# Altium PCB Connect.PcbDoc
Units mil, origin at the board's own origin, x right, y up, seen from the top; angles counter-clockwise.
Board outline 3917.27 x 3081.95 mil, 2 copper layers (Top Layer, Bottom Layer); 16 components, 33 nets, 102 pads, 4 vias.
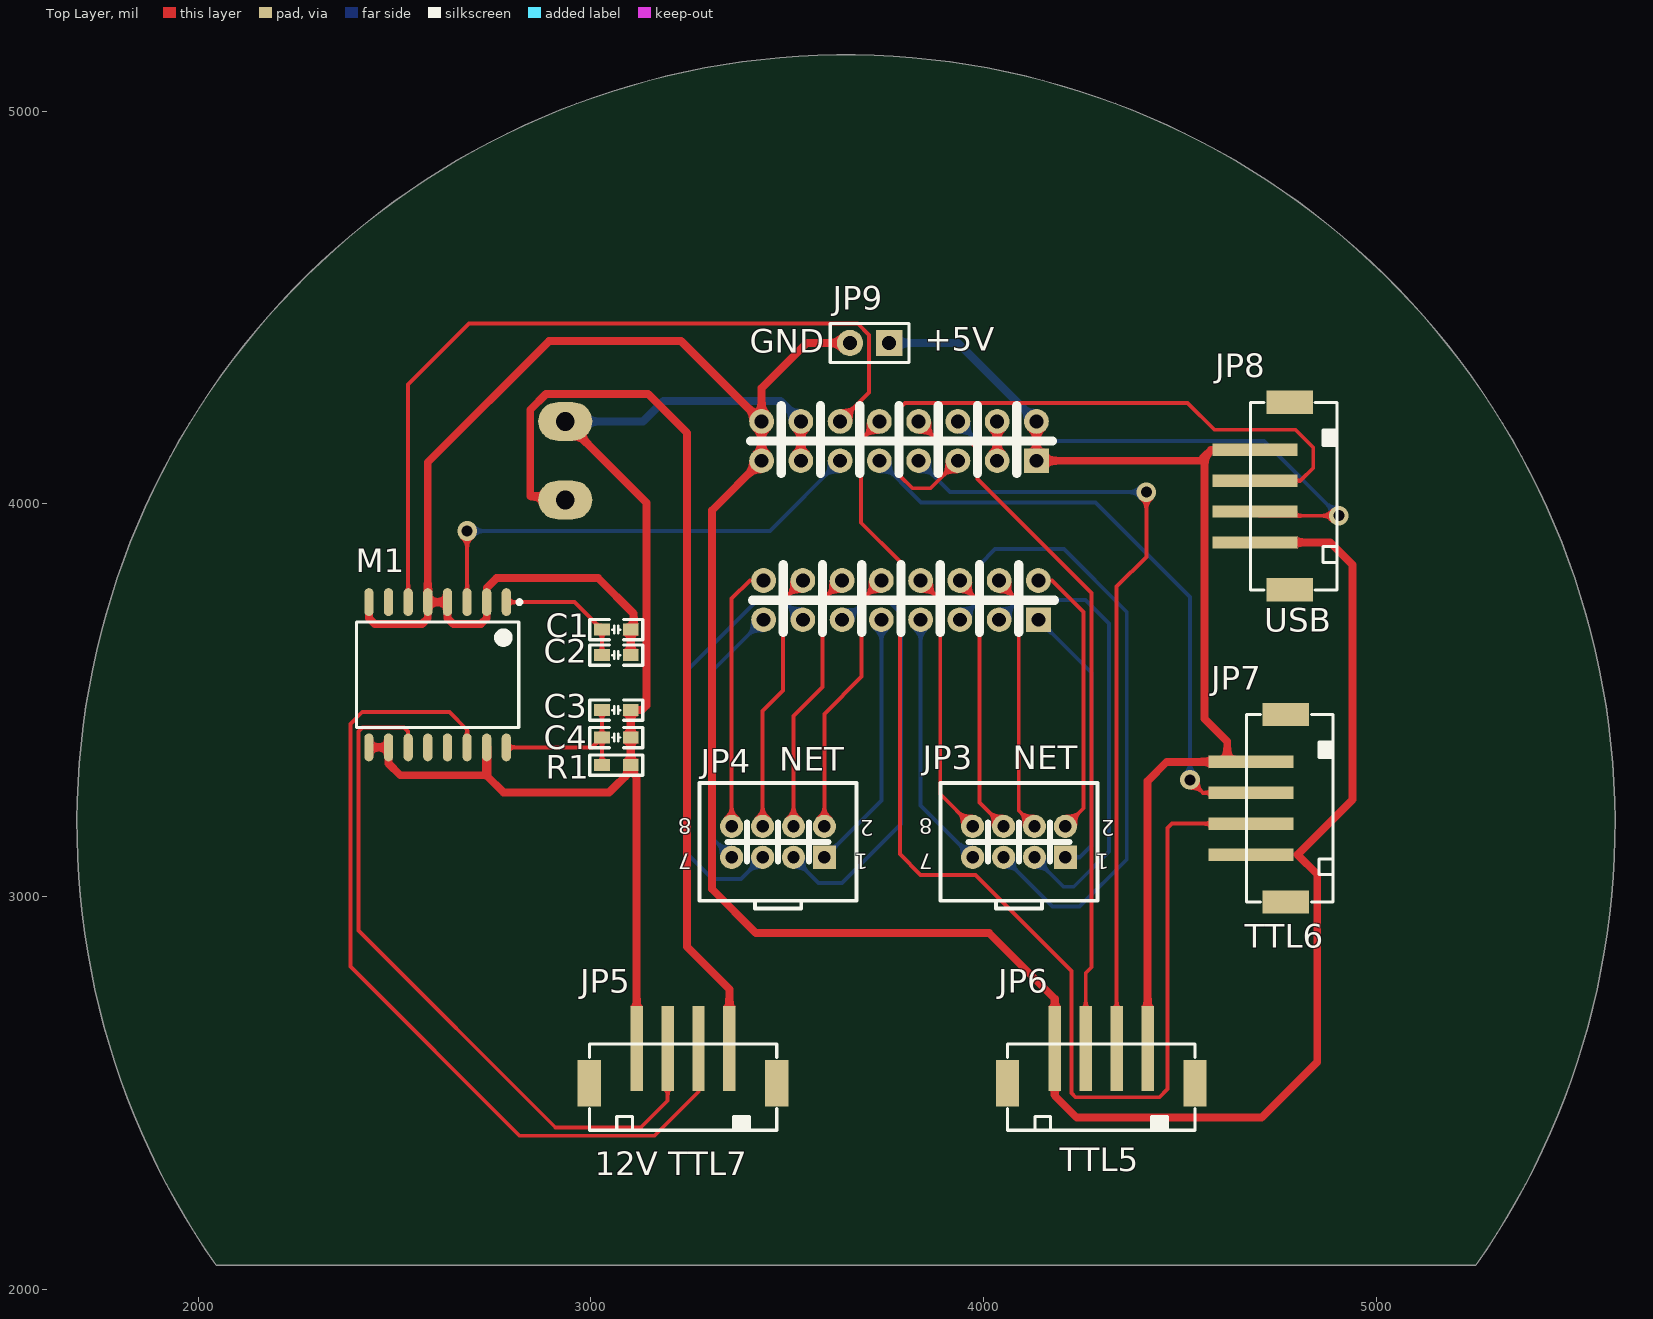
[diagram p0: Top Layer view]
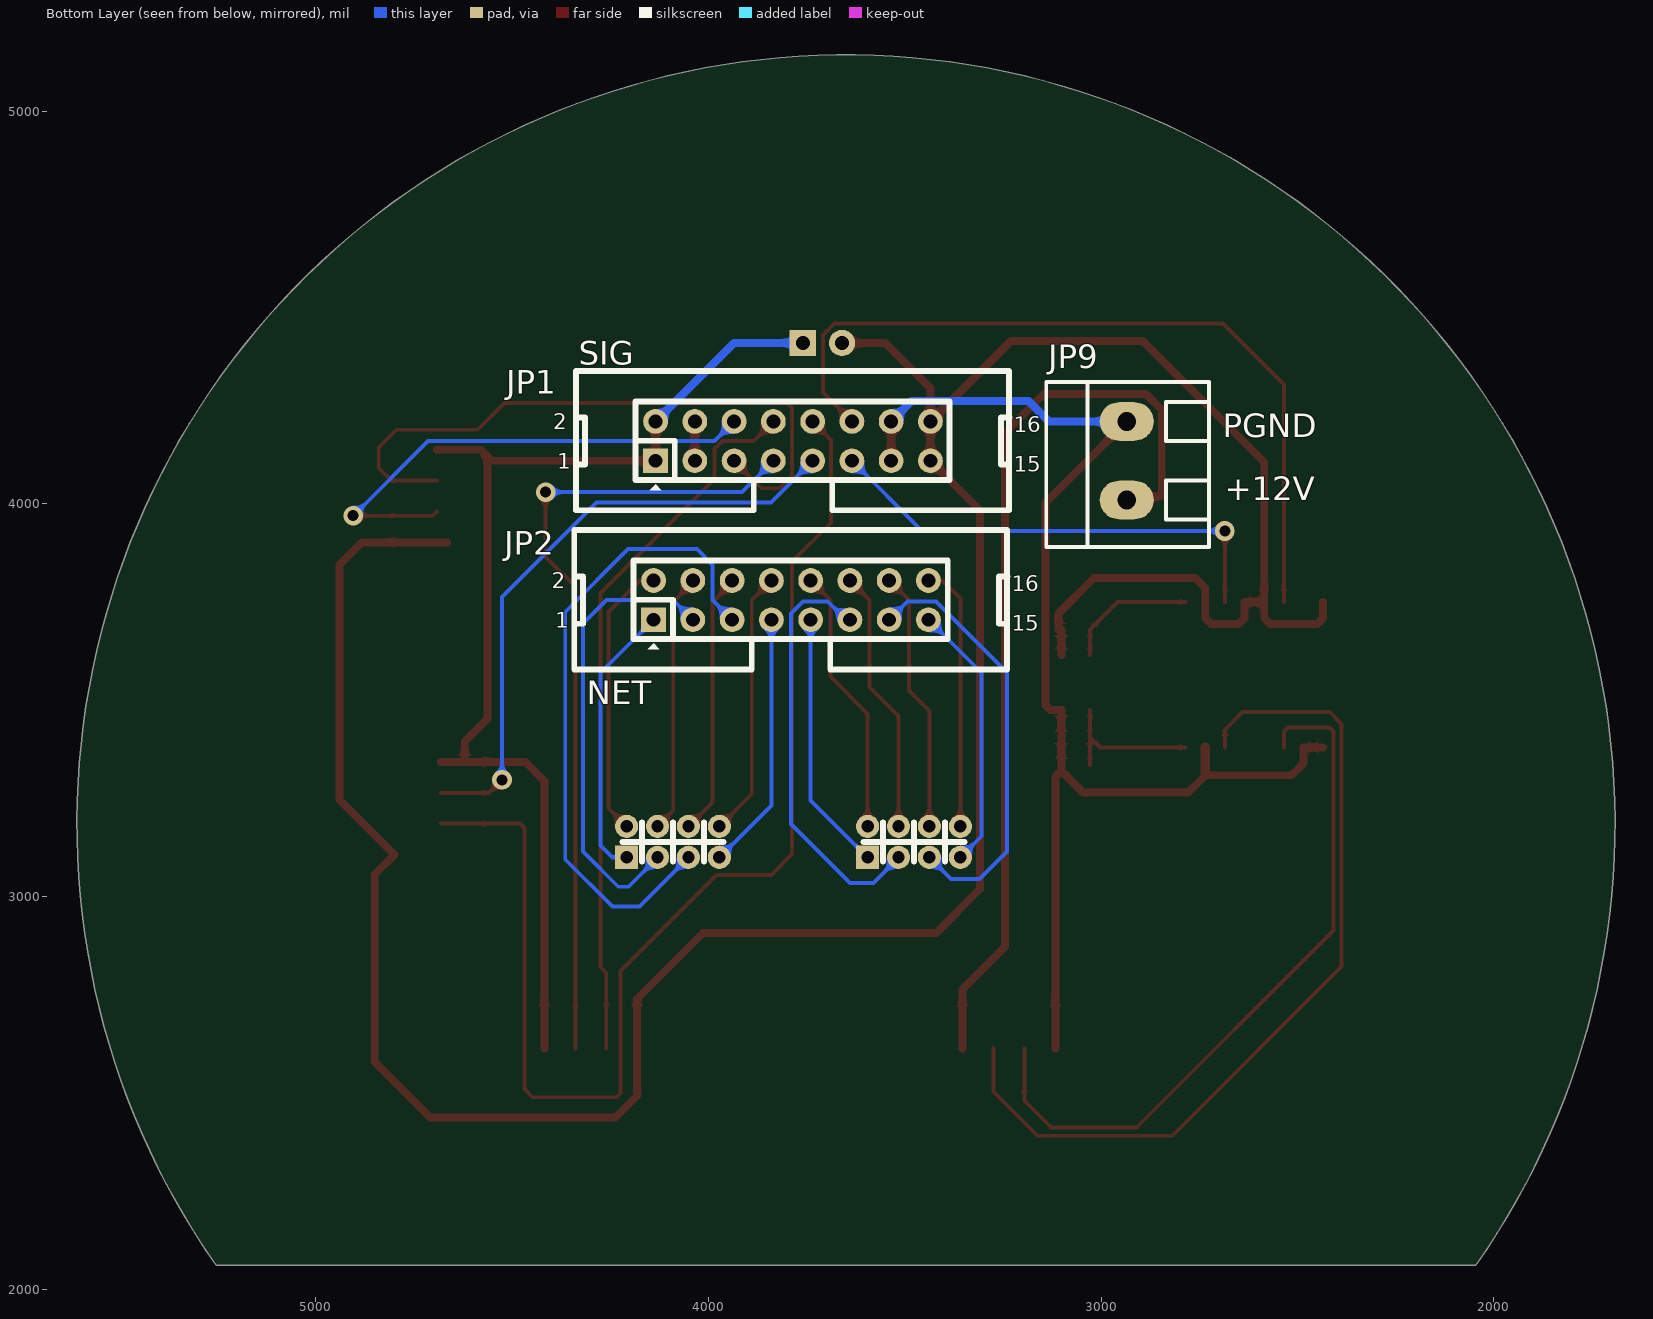
[diagram p1: Bottom Layer view, seen from below]

## Layer stack, top to bottom
Top Solder: solder mask 0.4, Solder Resist, Dk 3.5
Top Layer: signal copper 1.4
Dielectric 1: dielectric 12.6, FR-4, Dk 4.8
Bottom Layer: signal copper 1.4
Bottom Solder: solder mask 0.4, Solder Resist, Dk 3.5

## Board outline
2045.56,2061.56 cw(c3650,3185) 5254.44,2061.56

## Design rules (kind name [scope] priority, off if disabled: settings)
Clearance [All] p1: gap=10 ignorepadtopadclearanceinfootprint=FALSE
PolygonConnect [All] p1: connectstyle=Relief reliefconductorwidth=10 reliefentries=4 polygonreliefangle="90 Angle" airgapwidth=10
RoutingVias [All] p1: holewidth=28 width=50 viastyle="Through Hole" minholewidth=28 minwidth=50 maxholewidth=28 maxwidth=50
SolderMaskExpansion [All] p1: expansion=4
Width Width_POWER [InNetClass('POWER')] p1: maxlimit=40 minlimit=15 preferedwidth=20 minimp=50.000000 maximp=50.000000 favimp=50.000000
Width [All] p2: maxlimit=40 minlimit=10 preferedwidth=10 minimp=50.000000 maximp=50.000000 favimp=50.000000
30 further rules are at their usual default settings.

## Classes and differential pairs
net class power: +3.3 +5 +12 GND PGND
component class Connect: C1 C2 C3 C4 JP1 JP2 JP3 JP4 JP5 JP6 JP7 JP8 JP9 M1 R1

## Components (designator, comment, footprint, x,y, rotation, side; value= is the part's Value field where it differs from the comment)
C1 "10u" "C 0603_M" 3065,3680 r0 top
C2 "0.1u" "C 0603_M" 3065,3615 r0 top
C3 "10u" "C 0603_M" 3065,3475 r0 top
C4 "0.1u" "C 0603_M" 3065,3405 r0 top
JP1 "Header 8X2" IDC2.54-LI-2x8P 4135,4110 r180 bottom
JP2 "Header 8X2" IDC2.54-LI-2x8P 4140,3705 r180 bottom
JP3 "预留" PHB2.0-LI-2x4P 4090.63,3139.37 r180 top
JP4 "预留" PHB2.0-LI-2x4P 3476.89,3139.37 r180 top
JP5 "HDR-1X4" PH2.0-LS-4P 3235,2515 r180 top
JP6 "HDR-1X4" PH2.0-LS-4P 4300,2515 r180 top
JP7 "HDR-1X4" PH2.0-LS-4P 4780,3225 r270 top
JP8 "HDR-1X4" PH2.0-LS-4P 4790,4020 r270 top
JP9 "HDR-1X2" HDR2.54-LI-2P 3710,4410 r180 top
JP9 "HDR-1X2" KF128-5.08-2P 2935,4110 r90 bottom
M1 "ISOW7841" 7840 2610,3564.96 r270 top
R1 "10K" "R 0603_M" 3065,3335 r0 top

## Footprints (in the part's own frame and the unit in brackets; to place one, negate y for a bottom-side part, rotate by r counter-clockwise, add the part's x,y. Pads: shape width x height; smd on the part's side, far side on the other; paste and mask are expansions set on the pad)
7840 [mm]
  oval 1.8x0.6 smd: 1(-4.7,4.445) 2(-4.7,3.175) 3(-4.7,1.905) 4(-4.7,0.635) 5(-4.7,-0.635) 6(-4.7,-1.905) 7(-4.7,-3.175) 8(-4.7,-4.445) 9(4.7,-4.445) 10(4.7,-3.175) 11(4.7,-1.905) 12(4.7,-0.635) 13(4.7,0.635) 14(4.7,1.905) 15(4.7,3.175) 16(4.7,4.445)
  silkscreen extent -4.82,-5.25 3.4,5.42, body extent -3.8,-5.25 3.8,5.25, height 2.65
"C 0603_M" [mil] "无极性贴片电容"
  rect 40x30 smd: 1(-36.5,0) 2(36.5,0)
  silkscreen extent -68,-26 68,26, body extent -31,-16 31,16, height 32
HDR2.54-LI-2P [mm] "排针，2脚"
  rect 1.7x1.7 hole 0.9: 1(-1.27,0)
  round 1.7 hole 0.9: 2(1.27,0)
  silkscreen extent -2.54,-1.27 2.54,1.27, body extent -2.54,-1.27 2.54,1.27, height 8.5
IDC2.54-LI-2x8P [mm] "16P简易牛角座"
  rect 1.6x1.6 hole 0.9: 1(0,0)
  round 1.6 hole 0.9: 2(0,2.54) 3(2.54,0) 4(2.54,2.54) 5(5.08,0) 6(5.08,2.54) 7(7.62,0) 8(7.62,2.54) 9(10.16,0) 10(10.16,2.54) 11(12.7,0) 12(12.7,2.54) 13(15.24,0) 14(15.24,2.54) 15(17.78,0) 16(17.78,2.54)
  silkscreen extent -5.14,-3.2 22.89,5.8, body extent -5.08,-3.08 22.86,5.77, height 9.17
KF128-5.08-2P [mm] "螺钉式接线端子，脚距5.08mm"
  oval 2.5x3.5 hole 1.2: 1(-2.54,0) 2(2.54,0)
  silkscreen extent -5.59,-5.31 5.08,5.21, body extent -5.58,-5.3 5.08,5.2, height 14.15
PH2.0-LS-4P [mm] "长：12mm，宽：5.5mm，高：6.1mm"
  rect 1.5x3 smd: 0(-6.064,-0.254) 0(6.064,-0.254)
  rect 0.8x5.5 smd: 1(-3,-2.492) 2(-1,-2.492) 3(1,-2.492) 4(3,-2.492)
  silkscreen extent -6.06,-2.79 6.06,2.79, body extent -6,-5.05 6,2.75, height 6.15
PHB2.0-LI-2x4P [mm] "长：10mm，宽：7.3mm，高：7.8mm"
  rect 1.5x1.5 hole 0.8: 1(-3,1)
  round 1.5 hole 0.8: 2(-3,-1) 3(-1,1) 4(-1,-1) 5(1,1) 6(1,-1) 7(3,1) 8(3,-1)
  silkscreen extent -5.08,-3.81 5.08,4.32, body extent -5,-3.65 5,4.25, height 7.83
"R 0603_M" [mil] "1/10W贴片电阻"
  rect 40x31.5 smd: 1(-36.5,0) 2(36.5,0)
  silkscreen extent -68,-26 68,26, body extent -31,-16 32,16, height 16

## Part data
C1 C2 C3 C4: library part C, "无极性贴片电容"
JP1 JP2: "8*2P接插件", BOM名称=8*2P接, 学习资源=www.ooocke.
JP3 JP4: library part "Header 4X2", "4*2P接插件", BOM名称=4*2P接, 学习资源=www.ooocke.
JP5 JP6 JP7 JP8: library part "Header 4", "4P接插件", BOM名称=4P接, 学习资源=www.ooocke.
JP9 JP9: library part "Header 2", "2P接插件"
  JP9: BOM名称=2P接, 学习资源=www.ooocke.
R1: library part R, "贴片电阻"

## Via types
v1: diameter 50, hole 28, Top Layer to Bottom Layer, 4 vias

## Nets (pads, with @x,y where several pads share a name; then routed paths per layer and width w, separated by ;. In a path a pad name is that pad's centre, name@x,y a point inside that pad or via, vN(x,y) a via of type N, cw(c..) or ccw(c..) an arc to the next point about the centre after c; other vN are vias at no path point)
+3.3: JP1.3 JP1.4 | length 100
  Top Layer w20: JP1.3 JP1.4
+5: JP1.1 JP1.2 JP6.1 JP7.1 JP8.1 JP9.1@3760,4410 | length 2893.5
  Top Layer w20: JP1.2 JP1.1 4551.89,4110 4563,4121.11 ; JP6.1 4418.11,3294.22 4467,3343.11 JP7.1@4621,3343.11 ; JP7.1 JP7.1@4621,3343.11 ; JP8.1 4580,4138.11 4563,4121.11 ; 4563,4121.11 4563,3453 4621,3395 JP7.1@4621,3343.11
  Bottom Layer w20: JP9.1@3760,4410 3935,4410 JP1.2
+12: JP5.1 JP9.1@2935,4010 | length 2378.8
  Top Layer w20: JP9.1@2935,4010 2846,4020 2846,4240 2886,4280 3146,4280 3245,4181 3245,2872.11 3353.11,2764 JP5.1
GND: C1.2 C2.2 JP1.15 JP1.16 JP6.4 JP7.4 JP8.4 JP9.2@3660,4410 M1.2 M1.4 M1.5 M1.8 | length 7707.5
  Top Layer w20: M1.8 2435,3709 2450,3694 2570,3694 2585,3709 M1.5 ; C2.2 C1.2 3109,3680 3109,3721 3019,3811 2760,3811 2735,3786 M1.2 2735,3709 2720,3694 2650,3694 2635,3709 M1.4 M1.5 ; JP9.2@3660,4410 3550,4410 3435,4295 JP1.16 ; JP8.4@4666,3901.89 JP8.4 4883.11,3901.89 4940,3845 4940,3246.89 4800,3106.89 4850,3056.89 4850,2579 4708,2437 4238,2437 4181.89,2493.11 JP6.4 4181.89,2740 4014.89,2907 3421,2907 3309,3019 3309,3984 JP1.15 JP1.16 ; M1.5 2585,4106 2894,4415 3230,4415 JP1.16
NetC1_1: C1.1 C2.1 M1.1 | length 337.5
  Top Layer w10: M1.1 2958.5,3750 C1.1 C2.1
NetC3_1: C3.1 C4.1 M1.16 R1.1 | length 393.9
  Top Layer w10: M1.16 3003.42,3379.92 C4.1 ; R1.1 C4.1 ; C3.1 C4.1
P3_A_NO: JP2.4 JP3.4 | length 663.5
  Top Layer w10: JP2.4 4040,3800.63 4090,3750.63 4090,3218.74 JP3.4
P3_A_PO: JP2.2 JP3.2 | length 713.6
  Top Layer w10: JP2.2 4175,3805 4255,3725 4255,3225 JP3.2
P3_B_NO: JP2.8 JP3.8 | length 681.2
  Top Layer w10: JP2.8 3890,3755 3890,3261.26 JP3.8
P3_B_PO: JP2.6 JP3.6 | length 672.3
  Top Layer w10: JP2.6 3940,3800 3990,3750 3990,3240 JP3.6
P3_C_NO: JP2.3 JP3.3 | length 1164.8
  Bottom Layer w10: JP2.3 4090,3755 4260,3755 4320,3695 4320,3115 4230,3025 4203.47,3025 4130,3098.47 JP3.3
P3_C_PO: JP2.1 JP3.1 | length 709.6
  Bottom Layer w10: JP2.1 4275,3570 4275,3130 4245,3100 JP3.1
P3_D_NO: JP2.7 JP3.7 | length 659.9
  Bottom Layer w10: JP2.7 3840,3232.52 JP3.7
P3_D_PO: JP2.5 JP3.5 | length 1663.8
  Bottom Layer w10: JP2.5 3990,3755 3990,3845 4030,3885 4205,3885 4365,3725 4365,3095 4245,2975 4176.26,2975 JP3.5
P4_A_NO: JP2.12 JP4.4 | length 677.5
  Top Layer w10: JP4.4 3516.26,3460 3590,3533.74 3590,3755 JP2.12
P4_A_PO: JP2.10 JP4.2 | length 686.3
  Top Layer w10: JP4.2 3595,3465 3690,3560 3690,3755 JP2.10
P4_B_NO: JP2.16 JP4.8 | length 680.4
  Top Layer w10: JP4.8 3358.78,3758.78 3405,3805 JP2.16
P4_B_PO: JP2.14 JP4.6 | length 668.7
  Top Layer w10: JP4.6 3437.52,3472.52 3490,3525 3490,3755 JP2.14
P4_C_NO: JP2.11 JP4.3 | length 1081.4
  Bottom Layer w10: JP4.3 3516.26,3098.47 3579.73,3035 3640,3035 3790,3185 3790,3720.76 3759.26,3751.5 3696.5,3751.5 3650,3705 JP2.11
P4_C_PO: JP2.9 JP4.1 | length 665.1
  Bottom Layer w10: JP4.1 3740,3245 JP2.9
P4_D_NO: JP2.15 JP4.7 | length 683.2
  Bottom Layer w10: JP4.7 3305,3153.78 3305,3570 JP2.15
P4_D_PO: JP2.13 JP4.5 | length 1099.2
  Bottom Layer w10: JP4.5 3382.52,3045 3310,3045 3240,3115 3240,3570.76 3420.74,3751.5 3493.5,3751.5 JP2.13
P_RX7: JP5.3 M1.11 | length 1838.6
  Top Layer w10: M1.11 2535,3420 2524,3431 2419,3431 2408,3420 2408,2914 2909.51,2412.49 3128.12,2412.49 3195.63,2480 JP5.3
P_TX7: JP5.2 M1.14 | length 2212.5
  Top Layer w10: M1.14 2685,3425 2640,3470 2418,3470 2388,3440 2388,2822 2819,2391 3162.37,2391 3274.37,2503 JP5.2
PGND: C3.2 C4.2 JP1.13 JP1.14 JP5.4 JP9.2@2935,4210 M1.9 M1.10 M1.15 R1.2 | length 3297.7
  Top Layer w20: M1.9 M1.10 2485,3339 2515,3309 2734,3309 ; 2735,3310 2734,3309 ; JP9.2@2935,4210 3142,4003 3142,3487 3130,3475 C3.2 C4.2 R1.2 R1.2@3101.5,3320 ; JP5.4 3116.89,3304.61 R1.2@3101.5,3320 ; JP1.13 JP1.14 ; 2734,3309 2778,3265 3046.5,3265 R1.2@3101.5,3320
  Top Layer w25: 2735,3310 M1.15
  Bottom Layer w20: JP9.2@2935,4210 3133,4210 3185,4262 3483,4262 JP1.14
RX5: JP1.8 JP6.3 | length 1832
  Top Layer w10: JP1.8 3885,4160 3965,4160 3985,4140 3985,4063 4275,3773 4275,2820 4260.63,2805.63 JP6.3
RX6: JP1.10 JP7.3 | length 3173.8
  Top Layer w10: JP1.10 3688,4163 3688,3952 3787,3853 3787,3108 3840,3055 3980,3055 4224,2811 4224,2500 4235,2489 4448,2489 4469,2510 4469,3174.63 4480,3185.63 JP7.3
RX7: JP1.12 M1.6 | length 2054.9
  Top Layer w10: M1.6 2535,4304 2690,4459 3680,4459 3709,4430 3709,4284 JP1.12
TX5: JP1.7 JP6.2 | length 2061.4
  Top Layer w10: JP6.2 4339.37,3789.63 4415,3865.26 v1(4415,4030)
  Bottom Layer w10: JP1.7 3915,4030 v1(4415,4030)
TX6: JP1.9 JP7.2 | length 1569.9
  Top Layer w10: v1(4526,3297.37) 4559,3264.37 JP7.2
  Bottom Layer w10: JP1.9 3841.5,4003.5 4285.5,4003.5 4526,3763 v1(4526,3297.37)
TX7: JP1.11 M1.3 | length 1205.1
  Top Layer w10: M1.3 v1(2685,3931)
  Bottom Layer w10: v1(2685,3931) 3456,3931 JP1.11
U2_DM: JP1.5 JP8.2 | length 1680.4
  Top Layer w10: JP1.5 3865,4040 3819,4040 3788,4071 3788,4245 3800,4257 4520,4257 4588,4189 4795,4189 4840,4144 4840,4091.78 4807.59,4059.37 JP8.2
U2_DP: JP1.6 JP8.3 | length 1286.9
  Top Layer w10: JP8.3 4702.52,3970 v1(4905,3970)
  Bottom Layer w10: JP1.6 3985,4160 4714.63,4160 4904.63,3970 v1(4905,3970)
pads on no net: JP5.0 JP6.0 JP7.0 JP8.0 M1.7 M1.12 M1.13

## Silkscreen, mask and mechanical layers (free items; w line width, h text height)
Top Overlay:
  text "+5V" at 3850,4390 h60
  text "GND" at 3405,4385 h60
  text "USB" at 4715,3675 h60
  text "NET" at 4075,3324 h60
  text "NET" at 3480,3320 h60
  text "TTL6" at 4665,2870 h60
  text "TTL5" at 4195,2300 h60
  text "12V TTL7" at 3010,2290 h60
Bottom Overlay:
  text "SIG" at 4330,4355 h60
  text "PGND" at 2690,4170 h60
  text "+12V" at 2685,4010 h60
  text "NET" at 4310,3490 h60
Mechanical 1:
  circle w10: c2149.8,2318.86 r62.99
  circle w10: c5150.2,2318.86 r62.99
  circle w10: c1917.72,3185 r62.99
  circle w10: c2149.8,4051.14 r62.99
  circle w10: c2783.86,4685.2 r62.99
  circle w10: c3650,4917.28 r62.99
  circle w10: c4516.14,4685.2 r62.99
  circle w10: c5150.2,4051.14 r62.99
  circle w10: c5382.28,3185 r62.99
  lines w10: 2045.56,2061.56 cw(c3650,3185) 5254.44,2061.56 2045.56,2061.56

## Text inside footprints (layer, text, board x,y; h text height)
JP1: Bottom Overlay "2" at 4395,4190 h40; Bottom Overlay "1" at 4385,4090 h40; Bottom Overlay "16" at 3223,4182 h40; Bottom Overlay "15" at 3223,4082 h40
JP2: Bottom Overlay "2" at 4400,3785 h40; Bottom Overlay "1" at 4390,3685 h40; Bottom Overlay "16" at 3228,3777 h40; Bottom Overlay "15" at 3228,3677 h40
JP3: Top Overlay "8" at 3870.63,3199.37 h40 r180; Top Overlay "7" at 3870.63,3109.37 h40 r180; Top Overlay "1" at 4320.63,3109.37 h40 r180; Top Overlay "2" at 4335,3194.37 h40 r180
JP4: Top Overlay "8" at 3256.89,3199.37 h40 r180; Top Overlay "7" at 3256.89,3109.37 h40 r180; Top Overlay "1" at 3706.89,3109.37 h40 r180; Top Overlay "2" at 3721.26,3194.37 h40 r180